# Altium PCB LM-008.PcbDoc
Units mm, origin at the board's own origin, x right, y up, seen from the top; angles counter-clockwise.
Board outline 67.05 x 70.02 mm, 2 copper layers (Top Layer, Bottom Layer); 43 components, 25 nets, 161 pads, 4 vias.
Unrouted connection lines stored in the file: 20.
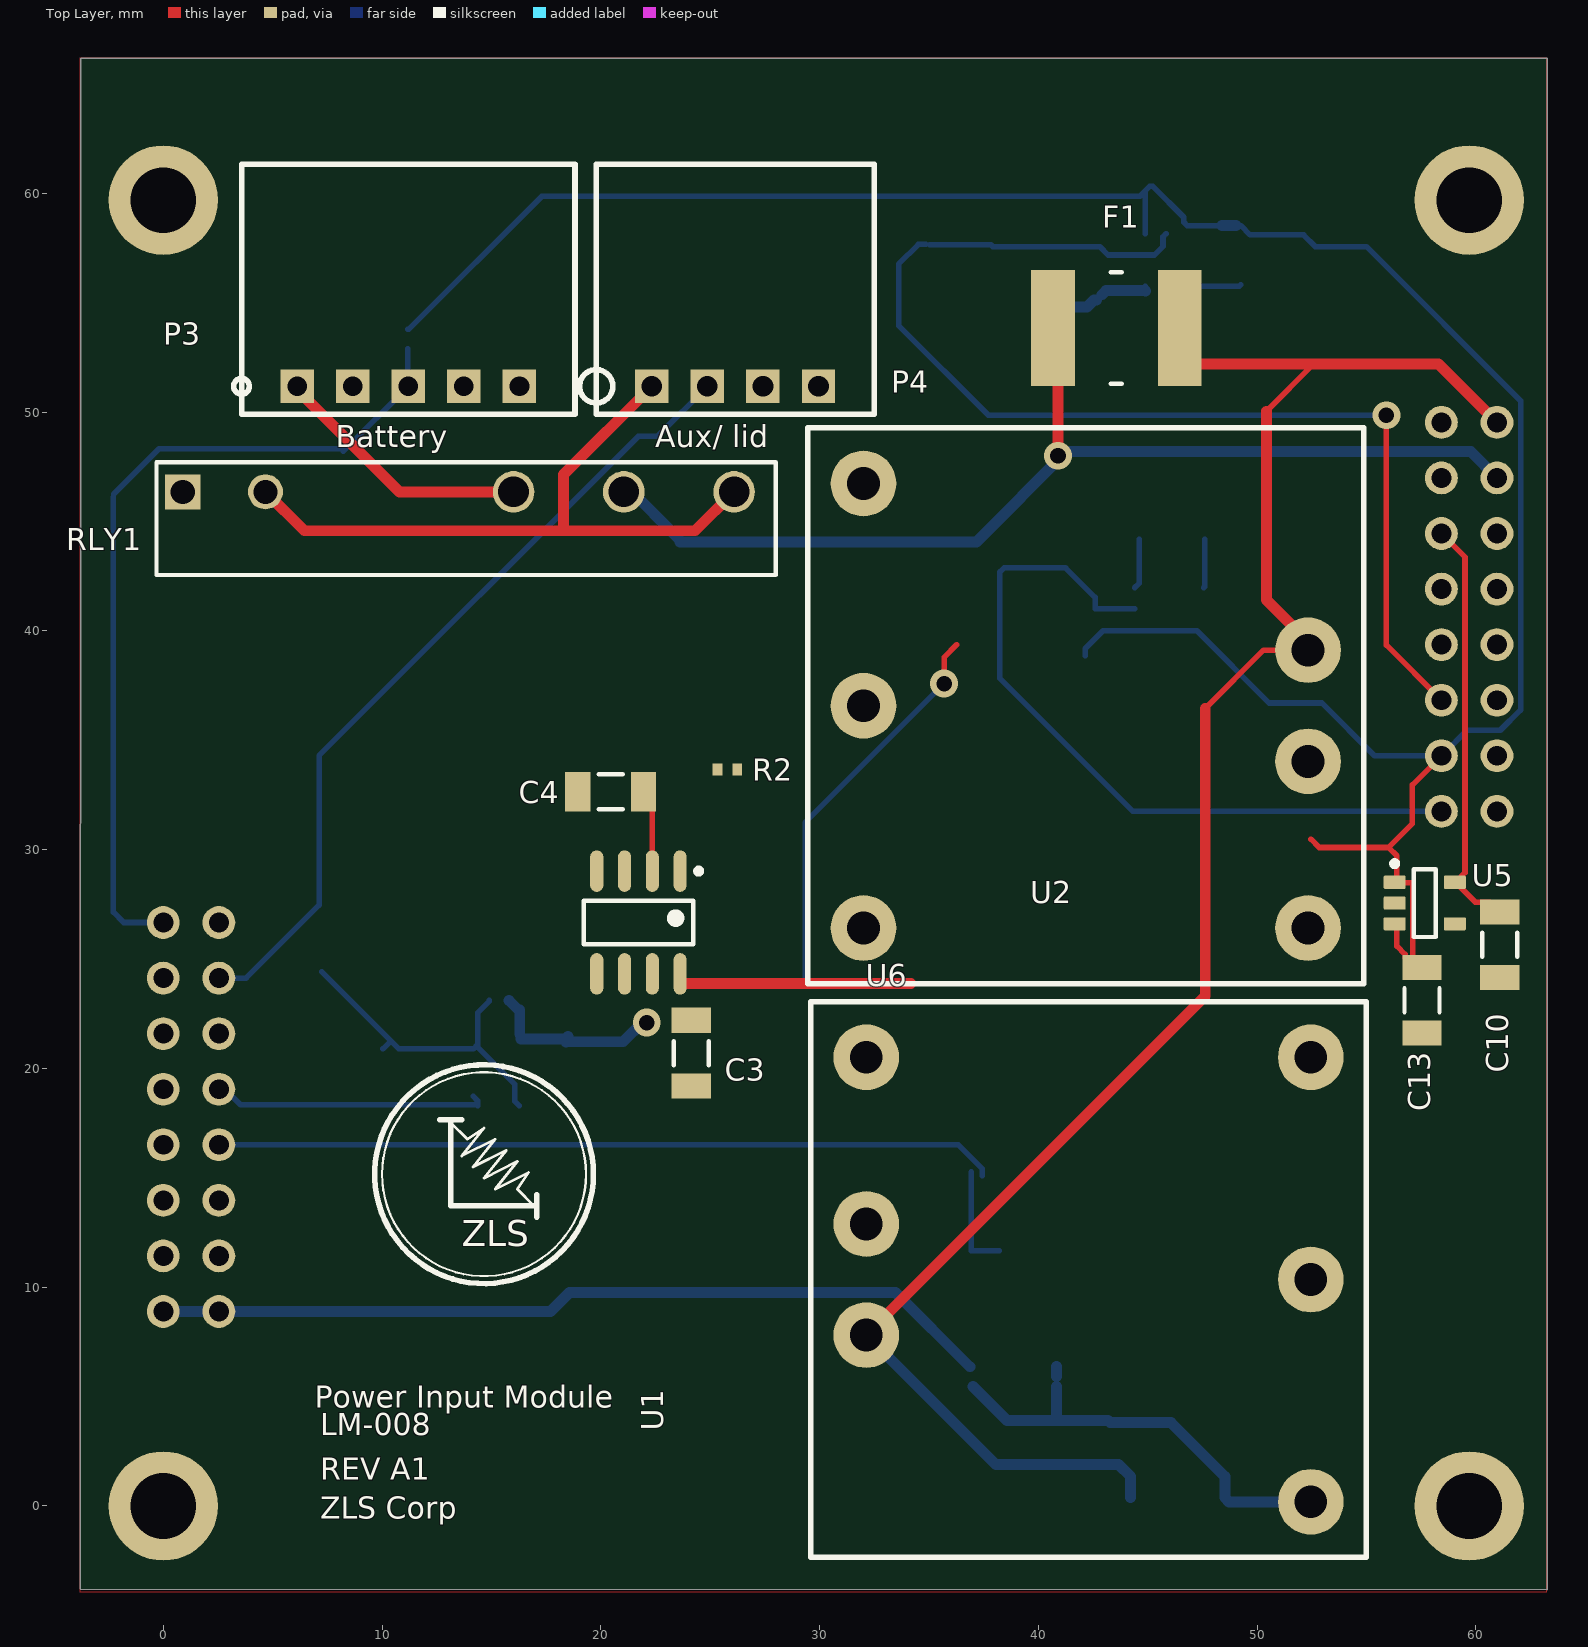
[diagram p0: Top Layer view]
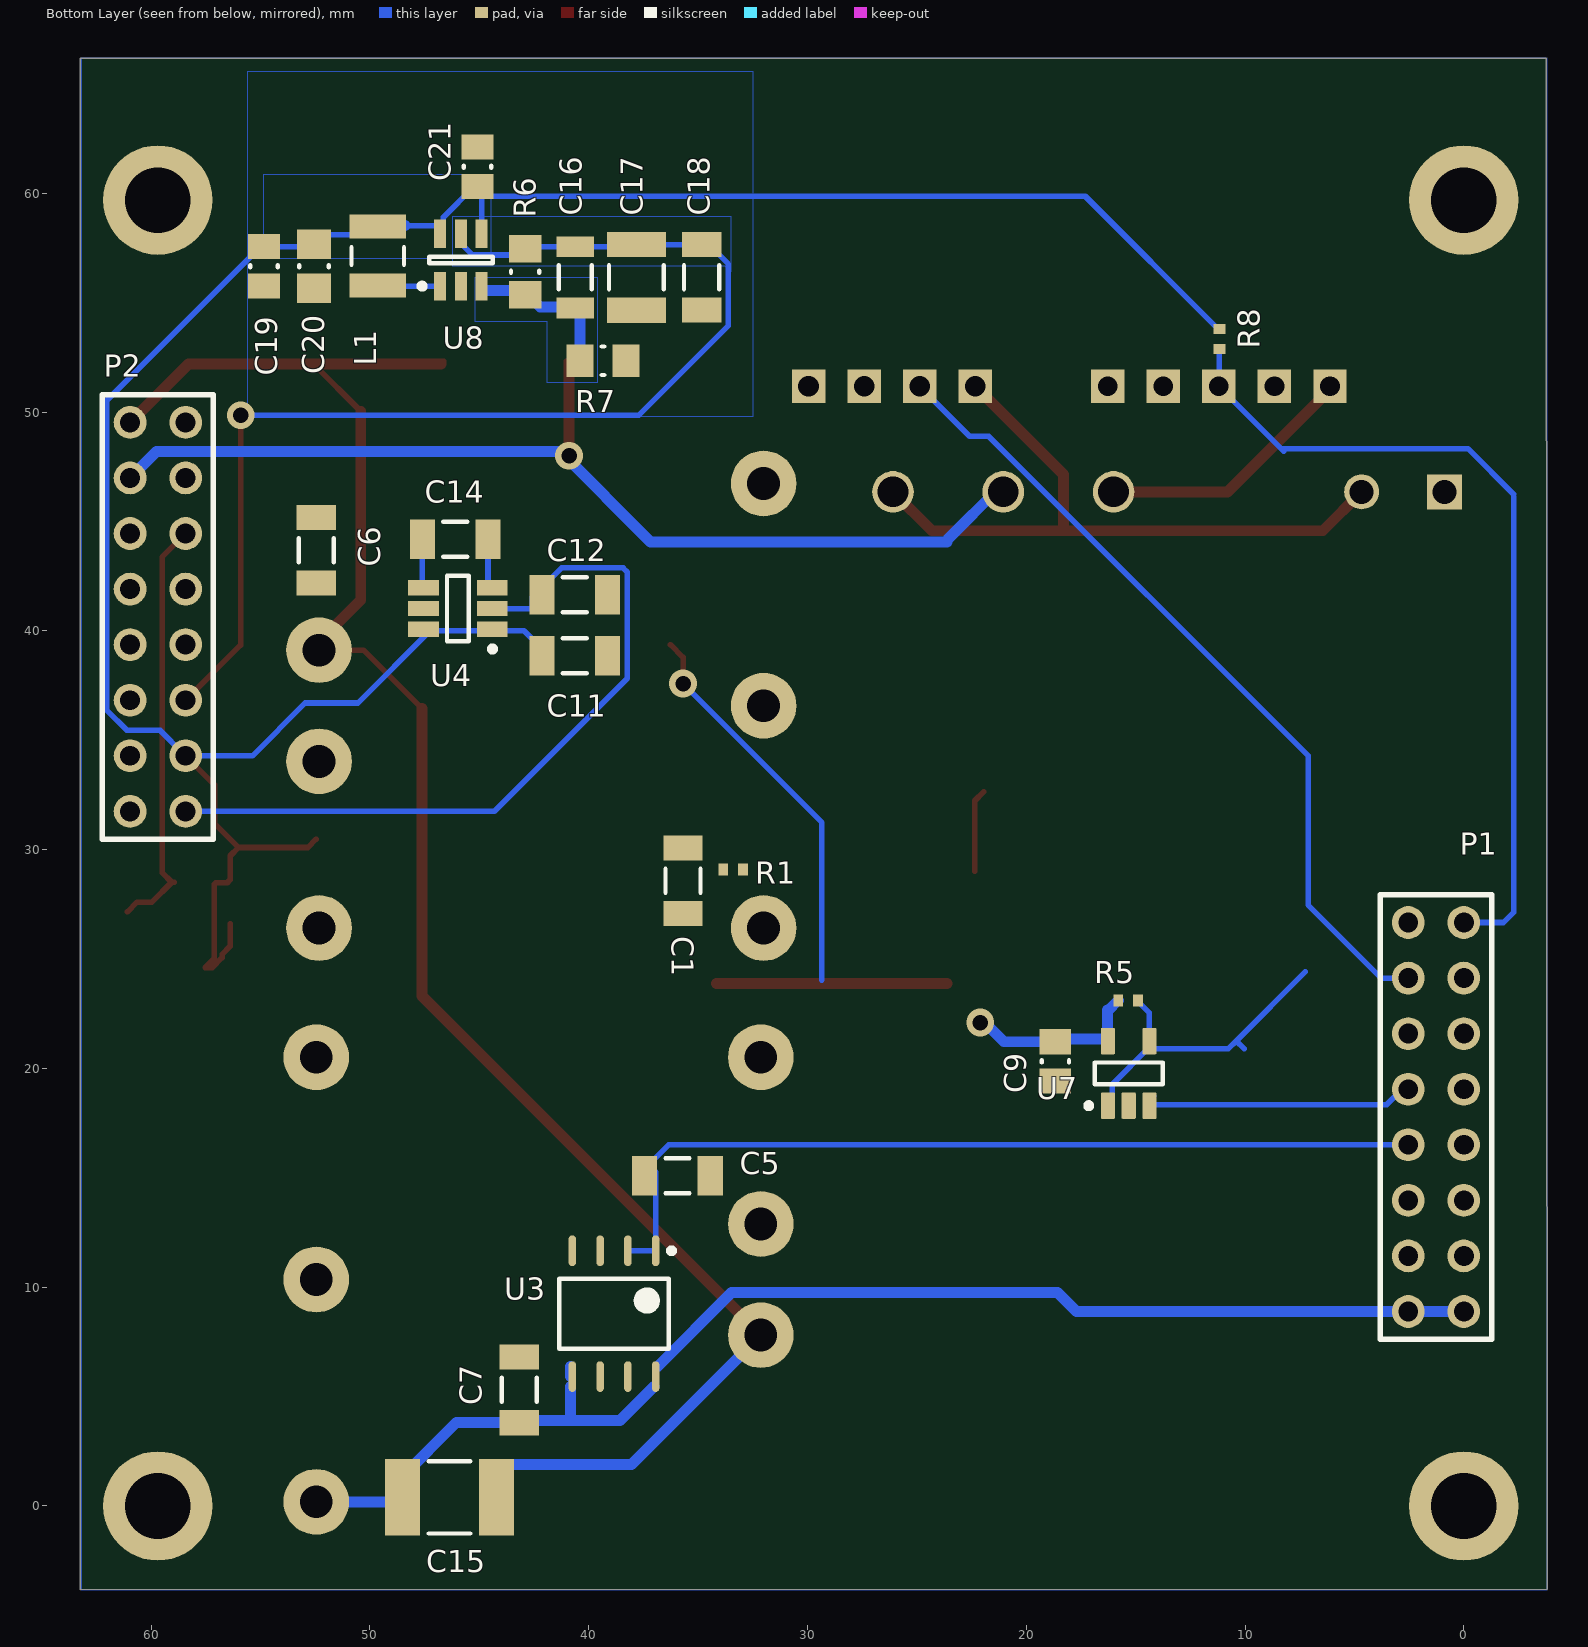
[diagram p1: Bottom Layer view, seen from below]

## Layer stack, top to bottom
Top Solder: solder mask 0.0102, Solder Resist, Dk 3.5
Top Layer: signal copper 0.0356
Dielectric 1: dielectric 0.32, FR-4, Dk 4.8
Bottom Layer: signal copper 0.0356
Bottom Solder: solder mask 0.0102, Solder Resist, Dk 3.5

## Board outline
-3.803,-3.81 63.246,-3.835 63.246,66.18 -3.778,66.178

## Design rules (kind name [scope] priority, off if disabled: settings)
Clearance [All] p1: gap=0.2 ignorepadtopadclearanceinfootprint=TRUE except(0.1: SMDPad-SMDPad)
HoleSize [All] p1: absolutevalues=TRUE maxlimit=5 minlimit=0.025 maxpercent=80.000 minpercent=20.000
MinimumSolderMaskSliver [All] p1: minsoldermaskwidth=0.037
PolygonConnect [All] p1: connectstyle=Relief reliefconductorwidth=0.254 reliefentries=4 polygonreliefangle="90 Angle" airgapwidth=0.254
RoutingVias [All] p1: holewidth=0.711 width=1.27 viastyle="Through Hole" minholewidth=0.711 minwidth=1.27 maxholewidth=0.711 maxwidth=1.27
SilkToSilkClearance [All] p1: silktosilkclearance=0.2
SilkToSolderMaskClearance [IsPad] p1: minsilkscreentomaskgap=0.175 clearancetoexposedcopper=TRUE
SolderMaskExpansion [All] p1: expansion=0.102
Width [All] p1: maxlimit=1 minlimit=0.127 preferedwidth=0.254
26 further rules are at their usual default settings.

## Classes and differential pairs
component class LM-008: C1 C2 C3 C4 C5 C6 C7 C8 C9 C10 C11 C12 C13 C14 C15 C22 P1 P2 R1 R2 R5 U1 U2 U3 U4 U5 U6 U7
component class 36V_Supply: C16 C17 C18 C19 C20 C21 L1 R6 R7 U8
component class Power_Input: F1 P3 P4 R8 RL2 RL? RLY1

## Components (designator, comment, footprint, x,y, rotation, side; value= is the part's Value field where it differs from the comment)
C1 "CAP CER 1UF 50V X7R 1210" CAPC1206(3216)130_N 35.687,28.575 r90 bottom
C2 "CAP CER 1UF 50V X7R 1210" CAPC1206(3216)130_N 68.326,40.513 r90 top
C3 "1uF" CAPC1206(3216)130_N 24.13,20.701 r90 top
C4 "CAP CER 1UF 50V X7R 1210" CAPC1206(3216)130_N 20.447,32.639 r180 top
C5 "CAP CER 1UF 50V X7R 1210" CAPC1206(3216)130_N 35.941,15.088 r0 bottom
C6 "CAP CER 1UF 50V X7R 1210" CAPC1206(3216)130_N 52.451,43.688 r90 bottom
C7 "CAP CER 1UF 50V X7R 1210" CAPC1206(3216)130_N 43.18,5.309 r270 bottom
C8 "CAP CER 1UF 50V X7R 1210" CAPC1206(3216)130_N 70.612,46.99 r0 top
C9 "CAP CER 0.1UF 16V X7R 0805" CAPC0805(2012)145_N 18.669,20.32 r270 bottom
C10 "CAP CER 1UF 50V X7R 1210" CAPC1206(3216)130_N 61.087,25.654 r90 top
C11 "CAP CER 1UF 50V X7R 1210" CAPC1206(3216)130_N 40.64,38.862 r0 bottom
C12 "CAP CER 1UF 50V X7R 1210" CAPC1206(3216)130_N 40.64,41.656 r0 bottom
C13 "CAP CER 1UF 50V X7R 1210" CAPC1206(3216)130_N 57.531,23.114 r90 top
C14 "CAP CER 1UF 50V X7R 1210" CAPC1206(3216)130_N 46.101,44.196 r180 bottom
C15 "CAP CER 470PF 3KV X7R 1812" CAPC1812(4532)230_M 46.368,0.391 r0 bottom
C16 "22pF" CAPC1206(3216)170_L 40.615,56.158 r90 bottom
C17 "CAP CER 1UF 50V X7R 1210" CAPC1210(3225)100_N 37.821,56.158 r90 bottom
C18 "CAP CER 0.47UF 50V X7R 1206" CAPC1206(3216)190_N 34.84,56.165 r90 bottom
C19 "CAP CER 1UF 16V X7R 0805" CAPC0805(2012)145_N 54.839,56.666 r90 bottom
C20 "4.7uF" CAPC0805(2012)145_M 52.553,56.666 r90 bottom
C21 "CAP CER 0.047UF 16V X7R 0603" CAPC0805(2012)145_N 45.085,61.214 r270 bottom
C22 "CAP CER 1UF 50V X7R 1210" CAPC1206(3216)130_N 66.961,-0.901 r0 top
F1 "PCT" CAPC7451X12N 43.561,53.848 r0 top
L1 "47uH" C1210 49.64,57.14 r270 bottom
P1 "TLW-108-05-G-D" TLW-108-05-G-D 1.27,17.78 r270 bottom
P2 "TLW-108-05-G-D" TLW-108-05-G-D 59.69,40.64 r270 bottom
P3 "IPL1-105-01-F-S-RA" IPL1-105-01-F-S-RA 11.197,51.178 r0 top
P4 "IPL1-104-01-L-S-RA-K" IPL1-104-01-L-S-RA-K 22.327,51.178 r0 top
R1 "DNP" RESC0402(1005)_L 33.401,29.083 r180 bottom
R2 "DNP" RESC0402(1005)_L 25.781,33.655 r0 top
R5 "1M" RESC0402(1005)_L 15.342,23.114 r0 bottom
R6 "RES SMD 280K OHM 1% 1/8W 0805" RESC0805(2012)_M 42.901,56.412 r270 bottom
R7 "RES SMD 10K OHM 1% 1/8W 0805" RESC0805(2012)_M 39.345,52.348 r180 bottom
R8 "6.98K" RESC0402(1005)_L 11.176,53.34 r90 bottom
RLY1 "APF30312" PNSC-PF-5-2800x500x1500_V 0.889,46.355 r0 top
U1 "LT1763CS8-5#PBF" LT-S8-8_L 21.717,26.67 r270 top
U2 "PXB15-24WS05/NT" PXB15-24WS05/NT 52.324,26.416 r180 top
U3 "BD90GA3WEFJ-E2" TSOP127P600X100-8N 38.843,8.791 r270 bottom
U4 "LTC1983ES6-5#TRMPBF" SOT95P323X100-6N 45.974,41.021 r0 bottom
U5 "TLV70233DBVR" DBV0005A_N 57.658,27.559 r0 top
U6 "CCG302412S" CCG30 32.131,12.891 r0 top
U7 "OPA188AIDBVR" DBV0005A_M 15.318,19.772 r90 bottom
U8 "LT3461" LT-S6-6-TSOT-23_N 45.841,56.956 r90 bottom

## Footprints (in the part's own frame and the unit in brackets; to place one, negate y for a bottom-side part, rotate by r counter-clockwise, add the part's x,y. Pads: shape width x height; smd on the part's side, far side on the other; paste and mask are expansions set on the pad)
C1210 [mm] "Chip Capacitor, Body 3.2x2.5mm, IPC High Density"
  rect 1.1x2.6 smd: 1(-1.35,0) 2(1.35,0)
  silkscreen extent -0.4,-1.2 0.4,1.2, body extent -1.7,-1.35 1.7,1.35, height 1.3
CAPC0805(2012)145_M [mm] "Chip Capacitor, Body 2.0x1.2mm, Height 1.45mm, IPC Low Density"
  rect 1.35x1.55 smd: 1(-1,0) 2(1,0)
  silkscreen extent -0.05,-0.67 0.05,0.68, body extent -1.1,-0.72 1.1,0.72, height 1.45
CAPC0805(2012)145_N [mm] "Chip Capacitor, Body 2.0x1.2mm, Height 1.45mm, IPC Medium Density"
  rect 1.15x1.45 smd: 1(-0.9,0) 2(0.9,0)
  silkscreen extent -0.05,-0.62 0.05,0.62, body extent -1.1,-0.72 1.1,0.73, height 1.45
CAPC1206(3216)130_N [mm] "Chip Capacitor, Body 3.2x1.6mm, Height 1.3mm, IPC Medium Density"
  rect 1.15x1.8 smd: 1(-1.5,0) 2(1.5,0)
  silkscreen extent -0.55,-0.8 0.55,0.8, body extent -1.7,-0.9 1.7,0.9, height 1.3
CAPC1206(3216)170_L [mm] "Chip Capacitor, Body 3.2x1.6mm, Height 1.7mm, IPC High Density"
  rect 0.95x1.7 smd: 1(-1.4,0) 2(1.4,0)
  silkscreen extent -0.55,-0.75 0.55,0.75, body extent -1.7,-0.9 1.7,0.9, height 1.7
CAPC1206(3216)190_N [mm] "Chip Capacitor, Body 3.2x1.6mm, Height 1.9mm, IPC Medium Density"
  rect 1.15x1.8 smd: 1(-1.5,0) 2(1.5,0)
  silkscreen extent -0.55,-0.8 0.55,0.8, body extent -1.7,-0.9 1.7,0.9, height 1.9
CAPC1210(3225)100_N [mm] "Chip Capacitor, Body 3.2x2.5mm, Height 1mm, IPC Medium Density"
  rect 1.15x2.7 smd: 1(-1.5,0) 2(1.5,0)
  silkscreen extent -0.55,-1.25 0.55,1.25, body extent -1.7,-1.35 1.7,1.35, height 1
CAPC1812(4532)230_M [mm] "Chip Capacitor, Body 4.5x3.2mm, Height 2.3mm, IPC Low Density"
  rect 1.6x3.5 smd: 1(-2.15,0) 2(2.15,0)
  silkscreen extent -0.95,-1.65 0.95,1.65, body extent -2.4,-1.7 2.4,1.7, height 2.3
CAPC7451X12N [mm] "Chip Capacitor, 2-Leads, Body 7.36x5.12mm, IPC Medium Density"
  rect 2x5.3 smd: 1(-2.9,0) 2(2.9,0)
  silkscreen extent -0.25,-2.55 0.25,2.55, body extent -3.99,-2.72 3.99,2.72, height 1.25
CCG30 [mm] "DC-DC Converter"
  round 3 hole 1.5: 1(0,7.62) 2(0,0) 3(0,-5.08) 4(20.32,-12.7) 5(20.32,-2.54) 6(20.32,7.62)
  silkscreen extent -2.54,-15.24 22.86,10.16, body extent -2.67,-15.37 22.99,10.29, height 9.9
DBV0005A_M [mm] "SOT23, 5-Leads, Body 3.05x1.75mm, Pitch 0.95mm, IPC Low Density"
  rrect15% 1.2x0.65 smd: 1(-1.475,0.95) 2(-1.475,0) 3(-1.475,-0.95) 4(1.475,-0.95) 5(1.475,0.95)
  silkscreen extent -1.6,-1.55 0.5,1.95, body extent -1.42,-1.46 1.42,1.46, height 1.08
DBV0005A_N [mm] "SOT23, 5-Leads, Body 3.05x1.75mm, Pitch 0.95mm, IPC Medium Density"
  rrect17% 1x0.6 smd: 1(-1.375,0.95) 2(-1.375,0) 3(-1.375,-0.95) 4(1.375,-0.95) 5(1.375,0.95)
  silkscreen extent -1.5,-1.55 0.5,1.92, body extent -1.42,-1.46 1.42,1.46, height 1.08
IPL1-104-01-L-S-RA-K [mil]
  rect 60x60 hole 37.4: 1(0,0) 2(100,0) 3(200,0) 4(300,0)
  silkscreen extent -130,-50 400,400, body extent -80,-12 380,380, height 258
IPL1-105-01-F-S-RA [mil]
  rect 60x60 hole 35.43: 1(-200,0) 2(-100,0) 3(0,0) 4(100,0) 5(200,0)
  silkscreen extent -314,-50 300,400, body extent -270,-7 290,390, height 258
LT-S6-6-TSOT-23_N [mm] "SOT23, 6-Leads, Body 2.9x1.75mm, Pitch 0.95mm, IPC Medium Density"
  rect 1.3x0.55 smd: 1(-1.2,0.95) 2(-1.2,0) 3(-1.2,-0.95) 4(1.2,-0.95) 5(1.2,0) 6(1.2,0.95)
  silkscreen extent -1.32,-1.45 0.15,1.9, body extent -0.87,-1.45 0.87,1.45, height 1
LT-S8-8_L [mm] "SOIC, 8-Leads, Body 4.9x3.9mm, Pitch 1.27mm, IPC High Density"
  oval 1.9x0.6 smd: 1(-2.35,1.905) 2(-2.35,0.635) 3(-2.35,-0.635) 4(-2.35,-1.905) 5(2.35,-1.905) 6(2.35,-0.635) 7(2.35,0.635) 8(2.35,1.905)
  silkscreen extent -2.47,-2.5 1,2.88, body extent -2,-2.5 2,2.5, height 1.76
PNSC-PF-5-2800x500x1500_V [mm] "PF, 5-Leads, Body 28x5mm"
  rect 1.6x1.6 hole 1.1: 1(0,0)
  round 1.6 hole 1.1: 2(3.78,0)
  round 1.9 hole 1.4: 3(15.12,0) 4(20.16,0) 5(25.2,0)
  silkscreen extent -1.2,-3.8 27.1,1.35, body extent -0.9,-3.8 27.1,1.2, height 15
PXB15-24WS05/NT [mm] "DC-DC Converter 5V 3A 15W"
  round 3 hole 1.5: 1(0,0) 2(0,-7.62) 3(0,-12.7) 4(20.32,-20.32) 5(20.32,-10.16) 6(20.32,0)
  silkscreen extent -2.54,-22.86 22.86,2.54, body extent -2.67,-22.99 22.99,2.67, height 9.9
RESC0402(1005)_L [mm] "Chip Resistor, Body 1.0x0.5mm, IPC High Density"
  rect 0.45x0.55 smd: 1(-0.45,0) 2(0.45,0)
  body extent -0.52,-0.27 0.53,0.28, height 0.4
RESC0805(2012)_M [mm] "Chip Resistor, Body 2.0x1.3mm, IPC Low Density"
  rect 1.25x1.5 smd: 1(-1.05,0) 2(1.05,0)
  silkscreen extent -0.05,-0.65 0.05,0.65, body extent -1.1,-0.67 1.1,0.67, height 0.7
SOT95P323X100-6N [mm] "SOT23, 6-Leads, Body 2.90x3.23mm, Pitch 0.95mm, IPC Medium Density"
  rect 1.4x0.7 smd: 1(-1.575,0.95) 2(-1.575,0) 3(-1.575,-0.95) 4(1.575,-0.95) 5(1.575,0) 6(1.575,0.95)
  silkscreen extent -1.7,-1.5 0.5,1.97, body extent -1.92,-1.5 1.93,1.5, height 1
TLW-108-05-G-D [mm]
  round 1.5 hole 0.91: 1(-8.89,-1.27) 2(-8.89,1.27) 3(-6.35,-1.27) 4(-6.35,1.27) 5(-3.81,-1.27) 6(-3.81,1.27) 7(-1.27,-1.27) 8(-1.27,1.27) 9(1.27,-1.27) 10(1.27,1.27) 11(3.81,-1.27) 12(3.81,1.27) 13(6.35,-1.27) 14(6.35,1.27) 15(8.89,-1.27) 16(8.89,1.27)
  silkscreen extent -10.16,-2.54 10.16,2.54, body extent -10.16,-2.51 10.16,2.51, height 6.35
TSOP127P600X100-8N [mm] "TSOP, 8-Leads, Body 4.90x3.90mm, Pitch 1.27mm, IPC Medium Density"
  oval 1.4x0.35 smd: 1(-2.875,1.905) 2(-2.875,0.635) 3(-2.875,-0.635) 4(-2.875,-1.905) 5(2.875,-1.905) 6(2.875,-0.635) 7(2.875,0.635) 8(2.875,1.905)
  silkscreen extent -3,-2.5 1.6,2.75, body extent -2,-2.5 2,2.5, height 1

## Part data
C1 C22: library part CMP-1037-04913-1, Capacitance=470pF, Manufacturer="Murata Electronics North America", Manufacturer Part Number=GRM32RR71H105KA01L, Operating Temperature="-55°C ~ 125°C", Package / Case="1210 (3225 Metric)", Ratings=-, Supplier Part Number 1=490-1863-6-ND, Temperature Coefficient=X7R, Tolerance=±10%, Voltage - Rated=50V, Applications="General Purpose", Category=Capacitors, ComponentLink1Description=http://search.murata.co.jp/Ceramy/image/img/A01X/G101/ENG/GRM32RR71H105KA01-01.pdf, ComponentLink1URL=http://search.murata.co.jp/Ceramy/image/img/A01X/G101/ENG/GRM32RR71H105KA01-01.pdf, Features=-, Height - Seated (Max)=-, Lead Spacing=-, Lead Style=-, Mounting Type="Surface Mount, MLCC", Packaging=Digi-Reel®, Part Status=Active, Pricing 1="1=0.35, 10=0.242, 100=0.1449, 500=0.10868 (USD)", RoHS="RoHS Compliant", Size / Dimension="0.126\" L x 0.098\" W (3.20mm x 2.50mm)", Stock 1=66890, Supplier 1=Digi-Key, Thickness (Max)="0.079\" (2.00mm)"
C2 C11 C12: library part CMP-1037-04913-1, Capacitance=10µF, Manufacturer="Murata Electronics North America", Manufacturer Part Number=GRM32RR71H105KA01L, Operating Temperature="-55°C ~ 125°C", Package / Case="1210 (3225 Metric)", Ratings=-, Supplier Part Number 1=490-1863-6-ND, Temperature Coefficient=X7R, Tolerance=±10%, Voltage - Rated=50V, Applications="General Purpose", Category=Capacitors, ComponentLink1Description=http://search.murata.co.jp/Ceramy/image/img/A01X/G101/ENG/GRM32RR71H105KA01-01.pdf, ComponentLink1URL=http://search.murata.co.jp/Ceramy/image/img/A01X/G101/ENG/GRM32RR71H105KA01-01.pdf, Features=-, Height - Seated (Max)=-, Lead Spacing=-, Lead Style=-, Mounting Type="Surface Mount, MLCC", Packaging=Digi-Reel®, Part Status=Active, Pricing 1="1=0.35, 10=0.242, 100=0.1449, 500=0.10868 (USD)", RoHS="RoHS Compliant", Size / Dimension="0.126\" L x 0.098\" W (3.20mm x 2.50mm)", Stock 1=66890, Supplier 1=Digi-Key, Thickness (Max)="0.079\" (2.00mm)"
C3: library part CMP-1037-04913-1
C4: library part CMP-1037-04913-1, Capacitance=10000pF, Manufacturer="Murata Electronics North America", Manufacturer Part Number=GRM32RR71H105KA01L, Operating Temperature="-55°C ~ 125°C", Package / Case="1210 (3225 Metric)", Ratings=-, Supplier Part Number 1=490-1863-6-ND, Temperature Coefficient=X7R, Tolerance=±10%, Voltage - Rated=50V, Applications="General Purpose", Category=Capacitors, ComponentLink1Description=http://search.murata.co.jp/Ceramy/image/img/A01X/G101/ENG/GRM32RR71H105KA01-01.pdf, ComponentLink1URL=http://search.murata.co.jp/Ceramy/image/img/A01X/G101/ENG/GRM32RR71H105KA01-01.pdf, Features=-, Height - Seated (Max)=-, Lead Spacing=-, Lead Style=-, Mounting Type="Surface Mount, MLCC", Packaging=Digi-Reel®, Part Status=Active, Pricing 1="1=0.35, 10=0.242, 100=0.1449, 500=0.10868 (USD)", RoHS="RoHS Compliant", Size / Dimension="0.126\" L x 0.098\" W (3.20mm x 2.50mm)", Stock 1=66890, Supplier 1=Digi-Key, Thickness (Max)="0.079\" (2.00mm)"
C5 C7 C10 C13 C14: library part CMP-1037-04913-1, Capacitance=1µF, Manufacturer="Murata Electronics North America", Manufacturer Part Number=GRM32RR71H105KA01L, Operating Temperature="-55°C ~ 125°C", Package / Case="1210 (3225 Metric)", Ratings=-, Supplier Part Number 1=490-1863-6-ND, Temperature Coefficient=X7R, Tolerance=±10%, Voltage - Rated=50V, Applications="General Purpose", Category=Capacitors, ComponentLink1Description=http://search.murata.co.jp/Ceramy/image/img/A01X/G101/ENG/GRM32RR71H105KA01-01.pdf, ComponentLink1URL=http://search.murata.co.jp/Ceramy/image/img/A01X/G101/ENG/GRM32RR71H105KA01-01.pdf, Features=-, Height - Seated (Max)=-, Lead Spacing=-, Lead Style=-, Mounting Type="Surface Mount, MLCC", Packaging=Digi-Reel®, Part Status=Active, Pricing 1="1=0.35, 10=0.242, 100=0.1449, 500=0.10868 (USD)", RoHS="RoHS Compliant", Size / Dimension="0.126\" L x 0.098\" W (3.20mm x 2.50mm)", Stock 1=66890, Supplier 1=Digi-Key, Thickness (Max)="0.079\" (2.00mm)"
C6 C8: library part CMP-1037-04913-1, Capacitance=6.8µF, Manufacturer="Murata Electronics North America", Manufacturer Part Number=GRM32RR71H105KA01L, Operating Temperature="-55°C ~ 125°C", Package / Case="1210 (3225 Metric)", Ratings=-, Supplier Part Number 1=490-1863-6-ND, Temperature Coefficient=X7R, Tolerance=±10%, Voltage - Rated=50V, Applications="General Purpose", Category=Capacitors, ComponentLink1Description=http://search.murata.co.jp/Ceramy/image/img/A01X/G101/ENG/GRM32RR71H105KA01-01.pdf, ComponentLink1URL=http://search.murata.co.jp/Ceramy/image/img/A01X/G101/ENG/GRM32RR71H105KA01-01.pdf, Features=-, Height - Seated (Max)=-, Lead Spacing=-, Lead Style=-, Mounting Type="Surface Mount, MLCC", Packaging=Digi-Reel®, Part Status=Active, Pricing 1="1=0.35, 10=0.242, 100=0.1449, 500=0.10868 (USD)", RoHS="RoHS Compliant", Size / Dimension="0.126\" L x 0.098\" W (3.20mm x 2.50mm)", Stock 1=66890, Supplier 1=Digi-Key, Thickness (Max)="0.079\" (2.00mm)"
C9: library part CMP-1036-04795-1, Capacitance=0.1µF, Manufacturer="Murata Electronics North America", Manufacturer Part Number=GRM219R71C104KA01D, Operating Temperature="-55°C ~ 125°C", Package / Case="0805 (2012 Metric)", Ratings=-, Supplier Part Number 1=490-1673-6-ND, Temperature Coefficient=X7R, Tolerance=±10%, Voltage - Rated=25V, Applications="General Purpose", Category=Capacitors, ComponentLink1Description=http://www.murata.com/~/media/webrenewal/support/library/catalog/products/capacitor/mlcc/c02e.ashx, ComponentLink1URL=http://www.murata.com/~/media/webrenewal/support/library/catalog/products/capacitor/mlcc/c02e.ashx, Features=-, Height - Seated (Max)=-, Lead Spacing=-, Lead Style=-, Mounting Type="Surface Mount, MLCC", Packaging=Digi-Reel®, Part Status=Active, Pricing 2="1=0.14, 10=0.098, 100=0.0462, 500=0.0324, 1000=0.02683 (USD)", RoHS="RoHS Compliant", Size / Dimension="0.079\" L x 0.049\" W (2.00mm x 1.25mm)", Stock 2=245331, Supplier 2=Digi-Key, Supplier Part Number 2=490-1683-6-ND, Thickness (Max)="0.053\" (1.35mm)"
C15: library part CMP-1040-00561-1, Capacitance=470pF, Case/Package=1812, Case Code (Metric)=4532, Manufacturer=Kemet, Manufacturer Part Number=C1812C471KHRACTU, Max Operating Temperature=125°C, Min Operating Temperature=-55°C, Package Quantity=1, Supplier Part Number 1=399-7289-6-ND, Tolerance=10%, Voltage Rating=3kV, Case Code (Imperial)=1812, ComponentLink1Description=http://www.kemet.com/docfinder?Partnumber=C1812C471KHRACTU, ComponentLink1URL=http://www.kemet.com/docfinder?Partnumber=C1812C471KHRACTU, Lead Free="Lead Free", Length=0.177inch, Packaging="Tape and Reel", Pricing 1="1=0.88, 10=0.666, 100=0.4761 (USD)", Stock 1=2705, Supplier 1=Digi-Key, Thickness=0.071inch, Voltage Rating (DC)=3kV, Width=0.126inch
C16: library part CMP-1037-04573-1, "CAP CER 22PF 50V C0G/NP0 1206", Manufacturer=KEMET, Manufacturer Part Number=C1206C220K5GACTU, Operating Temperature="-55°C ~ 125°C", Package / Case="1206 (3216 Metric)", Ratings=-, Supplier Part Number 1=399-8165-1-ND, Temperature Coefficient="C0G, NP0", Tolerance=±10%, Voltage - Rated=50V, Applications="General Purpose", Category=Capacitors, ComponentLink1Description=http://www.kemet.com/docfinder?Partnumber=C1206C220K2GACTU, ComponentLink1URL=http://www.kemet.com/docfinder?Partnumber=C1206C220K2GACTU, Failure Rate=-, Features="Low ESL", Height - Seated (Max)=-, Lead Spacing=-, Lead Style=-, Mounting Type="Surface Mount, MLCC", Packaging="Cut Tape (CT)", Part Status=Active, Pricing 1="1=0.18, 10=0.128, 100=0.06, 500=0.04208, 1000=0.03483 (USD)", RoHS="RoHS Compliant", Size / Dimension="0.126\" L x 0.063\" W (3.20mm x 1.60mm)", Stock 1=35613, Supplier 1=Digi-Key, Thickness (Max)="0.035\" (0.88mm)"
C17: library part CMP-1038-01123-1, Capacitance=1µF, Manufacturer="Taiyo Yuden", Manufacturer Part Number=UMK325B7105KH-T, Operating Temperature="-55°C ~ 125°C", Package / Case="1210 (3225 Metric)", Ratings=-, Supplier Part Number 1=587-1366-1-ND, Temperature Coefficient=X7R, Tolerance=±10%, Voltage - Rated=50V, Applications="General Purpose", Category=Capacitors, ComponentLink1Description=http://www.yuden.co.jp/productdata/catalog/en/mlcc_all_e.pdf, ComponentLink1URL=http://www.yuden.co.jp/productdata/catalog/en/mlcc_all_e.pdf, Features=-, Height - Seated (Max)=-, Lead Spacing=-, Lead Style=-, Mounting Type="Surface Mount, MLCC", Packaging="Cut Tape (CT)", Part Status=Active, Pricing 1="1=0.36, 10=0.247, 100=0.1398, 500=0.0987, 1000=0.08637 (USD)", RoHS="RoHS Compliant", Size / Dimension="0.126\" L x 0.098\" W (3.20mm x 2.50mm)", Stock 1=23864, Supplier 1=Digi-Key, Thickness (Max)="0.063\" (1.60mm)"
C18: library part CMP-1037-04570-1, Capacitance=0.47µF, Manufacturer="Taiyo Yuden", Manufacturer Part Number=UMK316B7474KL-T, Operating Temperature="-55°C ~ 125°C", Package / Case="1206 (3216 Metric)", Ratings=-, Supplier Part Number 1=587-1325-1-ND, Temperature Coefficient=X7R, Tolerance=±10%, Voltage - Rated=50V, Applications="General Purpose", Category=Capacitors, ComponentLink1Description=http://www.yuden.co.jp/productdata/catalog/en/mlcc_all_e.pdf, ComponentLink1URL=http://www.yuden.co.jp/productdata/catalog/en/mlcc_all_e.pdf, Features=-, Height - Seated (Max)=-, Lead Spacing=-, Lead Style=-, Mounting Type="Surface Mount, MLCC", Packaging="Cut Tape (CT)", Part Status=Active, Pricing 1="1=0.3, 10=0.203, 100=0.115, 500=0.08114, 1000=0.071 (USD)", RoHS="RoHS Compliant", Size / Dimension="0.126\" L x 0.063\" W (3.20mm x 1.60mm)", Stock 1=8658, Supplier 1=Digi-Key, Thickness (Max)="0.071\" (1.80mm)"
C19: library part CMP-1036-04795-1, Capacitance=1µF, Manufacturer="Taiyo Yuden", Manufacturer Part Number=EMK212B7105KG-T, Operating Temperature="-55°C ~ 125°C", Package / Case="0805 (2012 Metric)", Ratings=-, Supplier Part Number 1=587-1283-1-ND, Temperature Coefficient=X7R, Tolerance=±10%, Voltage - Rated=16V, Applications="General Purpose", Category=Capacitors, ComponentLink1Description=http://ds.yuden.co.jp/TYCOMPAS/ut/detail.do?productNo=EMK212B7105KG-T&fileName=EMK212B7105KG-T_SS&mode=specSheetDownload, ComponentLink1URL=http://ds.yuden.co.jp/TYCOMPAS/ut/detail.do?productNo=EMK212B7105KG-T&fileName=EMK212B7105KG-T_SS&mode=specSheetDownload, Features=-, Height - Seated (Max)=-, Lead Spacing=-, Lead Style=-, Mounting Type="Surface Mount, MLCC", Packaging="Cut Tape (CT)", Part Status=Active, Pricing 1="1=0.13, 10=0.089, 100=0.042, 1000=0.02439 (USD)", RoHS="RoHS Compliant", Size / Dimension="0.079\" L x 0.049\" W (2.00mm x 1.25mm)", Stock 1=41495, Supplier 1=Digi-Key, Thickness (Max)="0.053\" (1.35mm)"
C20: library part CMP-1036-04750-1, "CAP CER 4.7UF 16V X7R 0805", Manufacturer=KEMET, Manufacturer Part Number=C0805C475K4RACTU, Operating Temperature="-55°C ~ 125°C", Package / Case="0805 (2012 Metric)", Ratings=-, Supplier Part Number 1=399-7415-1-ND, Temperature Coefficient=X7R, Tolerance=±10%, Voltage - Rated=16V, Applications="General Purpose", Category=Capacitors, ComponentLink1Description=http://www.kemet.com/docfinder?Partnumber=C0805C475K4RACTU, ComponentLink1URL=http://www.kemet.com/docfinder?Partnumber=C0805C475K4RACTU, Failure Rate=-, Features="Low ESL", Height - Seated (Max)=-, Lead Spacing=-, Lead Style=-, Mounting Type="Surface Mount, MLCC", Packaging="Cut Tape (CT)", Part Status=Active, Pricing 1="1=0.26, 10=0.176, 100=0.0894, 500=0.06118, 1000=0.05412 (USD)", RoHS="RoHS Compliant", Size / Dimension="0.079\" L x 0.049\" W (2.00mm x 1.25mm)", Stock 1=88820, Supplier 1=Digi-Key, Thickness (Max)="0.055\" (1.40mm)"
C21: library part CMP-1036-04795-1, Capacitance=0.047µF, Manufacturer="Murata Electronics North America", Manufacturer Part Number=GRM188R71C473KA01D, Operating Temperature="-55°C ~ 125°C", Package / Case="0603 (1608 Metric)", Ratings=-, Supplier Part Number 1=490-1529-6-ND, Temperature Coefficient=X7R, Tolerance=±10%, Voltage - Rated=16V, Applications="General Purpose", Category=Capacitors, ComponentLink1Description=http://www.murata.com/~/media/webrenewal/support/library/catalog/products/capacitor/mlcc/c02e.ashx, ComponentLink1URL=http://www.murata.com/~/media/webrenewal/support/library/catalog/products/capacitor/mlcc/c02e.ashx, Features=-, Height - Seated (Max)=-, Lead Spacing=-, Lead Style=-, Mounting Type="Surface Mount, MLCC", Packaging=Digi-Reel®, Part Status=Active, Pricing 1="1=0.1, 10=0.046, 100=0.0206, 500=0.0147, 1000=0.01155 (USD)", RoHS="RoHS Compliant", Size / Dimension="0.063\" L x 0.031\" W (1.60mm x 0.80mm)", Stock 1=26, Supplier 1=Digi-Key, Thickness (Max)="0.035\" (0.90mm)"
L1: library part Inductor, "FIXED IND 47UH 170MA 1.3 OHM SMD", DC Resistance (DCR)="1.69 Ohm Max", Manufacturer="Murata Electronics North America", Manufacturer Part Number=LQH32CN470K23L, Operating Temperature="-40°C ~ 85°C", Package / Case=Nonstandard, Q @ Freq=-, Supplier Device Package=1210, Supplier Part Number 1=490-2497-1-ND, Tolerance=±10%, Category="Inductors, Coils, Chokes", ComponentLink1Description=http://search.murata.co.jp/Ceramy/image/img/P02/JELF243A-0039.pdf, ComponentLink1URL=http://search.murata.co.jp/Ceramy/image/img/P02/JELF243A-0039.pdf, Height - Seated (Max)="0.067\" (1.70mm)", Material - Core=Ferrite, Mounting Type="Surface Mount", Packaging="Cut Tape (CT)", Part Status=Active, Pricing 1="1=0.33, 10=0.297, 100=0.2043, 500=0.17458, 1000=0.13372 (USD)", Ratings=-, RoHS="RoHS Compliant", Shielding=Unshielded, Size / Dimension="0.126\" L x 0.098\" W (3.20mm x 2.50mm)", Stock 1=1058, Supplier 1=Digi-Key, Type=Wirewound
P1 P2: "CONN HEADER .100\" 16POS DL GOLD", Current Rating="5.2A per Contact", Insulation Color=Black, Manufacturer="Samtec Inc.", Material Flammability Rating=-, Operating Temperature="-55°C ~ 125°C", Supplier Part Number 1=SAM1094-08-ND, Applications=-, Category="Connectors, Interconnects", ComponentLink1Description=http://suddendocs.samtec.com/prints/tlw-mkt.pdf, ComponentLink1URL=http://suddendocs.samtec.com/prints/tlw-mkt.pdf, Connector Type=Header, Contact Finish - Mating=Gold, Contact Finish - Post=Gold, Contact Finish Thickness - Mating="10µin (0.25µm)", Contact Finish Thickness - Post=Flash, Contact Length - Mating="0.105\" (2.67mm)", Contact Length - Post="0.170\" (4.32mm)", Contact Material="Phosphor Bronze", Contact Shape=Square, Contact Type="Male Pin", Fastening Type=Push-Pull, Features=-, Ingress Protection=-, Insulation Height="0.060\" (1.52mm)", Insulation Material="Liquid Crystal Polymer (LCP)", Manufacturer Part Number=TLW-108-05-G-D, Mated Stacking Heights=-, Mounting Type="Through Hole", Number of Positions=16, Number of Positions Loaded=All, Number of Rows=2, Overall Contact Length="0.335\" (8.51mm)", Packaging=Bulk, Part Status=Active, Pitch - Mating="0.100\" (2.54mm)", Pricing 1="1=4.48, 10=4.006, 100=3.2987, 500=2.60756, 1000=2.23842, 5000=2.04207, 10000=1.96353 (USD)", RoHS="RoHS Compliant", Row Spacing - Mating="0.100\" (2.54mm)", Shrouding=Unshrouded, Stock 1=0, Style="Board to Board or Cable", Supplier 1=Digi-Key, Termination=Solder, Voltage Rating=-
P3: Supplier Part Number 1=IPL1-105-01-F-S-RA-K-ND, Supplier 1=Digi-Key
P4: Current Rating=-, Insulation Color=Natural, Manufacturer="Samtec Inc.", Material Flammability Rating="UL94 V-0", Operating Temperature="-55°C ~ 125°C", Supplier Part Number 1=SAM9597-ND, Voltage Rating="675VAC, 954VDC", Applications=-, Category="Connectors, Interconnects", ComponentLink1Description=http://suddendocs.samtec.com/prints/ipl1-1xx-xx-xxx-s-xx-x-xx-mkt.pdf, ComponentLink1URL=http://suddendocs.samtec.com/prints/ipl1-1xx-xx-xxx-s-xx-x-xx-mkt.pdf, Connector Type=Header, Contact Finish - Mating=Gold, Contact Finish - Post=Tin, Contact Finish Thickness - Mating="10µin (0.25µm)", Contact Finish Thickness - Post=-, Contact Length - Mating="0.215\" (5.46mm)", Contact Length - Post="0.085\" (2.16mm)", Contact Material="Phosphor Bronze", Contact Shape=Square, Contact Type="Male Pin", Fastening Type="Locking Ramp", Features=-, Ingress Protection=-, Insulation Height="0.240\" (6.10mm)", Insulation Material="Liquid Crystal Polymer (LCP)", Manufacturer Part Number=IPL1-104-01-L-S-RA-K, Mated Stacking Heights=-, Mounting Type="Through Hole, Right Angle", Number of Positions=4, Number of Positions Loaded=All, Number of Rows=1, Overall Contact Length=-, Packaging=Tube, Part Status=Active, Pitch - Mating="0.100\" (2.54mm)", Pricing 1="1=2.53, 10=2.424, 100=2.02, 500=1.717, 1000=1.4645, 5000=1.313 (USD)", RoHS="RoHS Compliant", Row Spacing - Mating=-, Shrouding="Shrouded - 4 Wall", Stock 1=265, Style="Board to Cable/Wire", Supplier 1=Digi-Key, Termination=Solder
R1 R2: library part CMP-1011-00927-1, "TBD"
R5: library part CMP-1011-00927-1, Supplier Device Package=0402, Supplier Part Number 1=YAG3220CT-ND, Temperature Coefficient=±100ppm/°C, Tolerance=±1%
R6: library part CMP-1013-00017-1, Manufacturer="Vishay Dale", Manufacturer Part Number=CRCW0805280KFKEA, Operating Temperature="-55°C ~ 155°C", Package / Case="0805 (2012 Metric)", Power (Watts)="0.125W, 1/8W", Resistance (Ohms)=280k, Supplier Device Package=0805, Supplier Part Number 1=541-280KCTR-ND, Temperature Coefficient=±100ppm/°C, Tolerance=±1%, Category=Resistors, ComponentLink1Description=http://www.vishay.com/docs/20035/dcrcwe3.pdf, ComponentLink1URL=http://www.vishay.com/docs/20035/dcrcwe3.pdf, Composition="Thick Film", Failure Rate=-, Features="Automotive AEC-Q200", Height - Seated (Max)="0.020\" (0.50mm)", Packaging="Tape & Reel (TR)", Part Status=Active, Pricing 1="5000=0.00546, 10000=0.00474, 25000=0.00417, 50000=0.00382, 125000=0.00375 (USD)", RoHS="RoHS Compliant", Size / Dimension="0.079\" L x 0.049\" W (2.00mm x 1.25mm)", Stock 1=10000, Supplier 1=Digi-Key
R7: library part CMP-1013-00017-1, Manufacturer=Yageo, Manufacturer Part Number=RC0805FR-0710KL, Operating Temperature="-55°C ~ 155°C", Package / Case="0805 (2012 Metric)", Power (Watts)="0.125W, 1/8W", Resistance (Ohms)=10k, Supplier Device Package=0805, Supplier Part Number 1=311-10.0KCRCT-ND, Temperature Coefficient=±100ppm/°C, Tolerance=±1%, Category=Resistors, ComponentLink1Description=http://www.yageo.com/documents/recent/PYu-RC_Group_51_RoHS_L_7.pdf, ComponentLink1URL=http://www.yageo.com/documents/recent/PYu-RC_Group_51_RoHS_L_7.pdf, Composition="Thick Film", Failure Rate=-, Features="Moisture Resistant", Height - Seated (Max)="0.024\" (0.60mm)", Packaging="Cut Tape (CT)", Part Status=Active, Pricing 1="1=0.1, 10=0.022, 100=0.0088, 1000=0.00396, 2500=0.00344 (USD)", RoHS="RoHS Compliant", Size / Dimension="0.079\" L x 0.049\" W (2.00mm x 1.25mm)", Stock 1=13336570, Supplier 1=Digi-Key
R8: library part CMP-1011-00927-1, "RES SMD 6.98K OHM 1% 1/16W 0402", Manufacturer=Yageo, Manufacturer Part Number=RC0402FR-076K98L, Operating Temperature="-55°C ~ 155°C", Package / Case="0402 (1005 Metric)", Power (Watts)="0.063W, 1/16W", Supplier Device Package=0402, Supplier Part Number 1=YAG3220CT-ND, Temperature Coefficient=±100ppm/°C, Tolerance=±1%, Category=Resistors, ComponentLink1Description=http://www.yageo.com/documents/recent/PYu-RC_Group_51_RoHS_L_7.pdf, ComponentLink1URL=http://www.yageo.com/documents/recent/PYu-RC_Group_51_RoHS_L_7.pdf, Composition="Thick Film", Failure Rate=-, Features="Moisture Resistant", Height - Seated (Max)="0.016\" (0.40mm)", Packaging="Cut Tape (CT)", Part Status=Active, Pricing 1="1=0.1, 10=0.014, 100=0.0055, 1000=0.00247, 2500=0.00214, 5000=0.00177 (USD)", RoHS="RoHS Compliant", Size / Dimension="0.039\" L x 0.020\" W (1.00mm x 0.50mm)", Stock 1=182255, Supplier 1=Digi-Key
RLY1: library part CMP-1503-00270-1, "PF Relays, 12 V Coil Voltage, 170 mW Nominal Operating Power, -40 to 85 degC, 5-Pin PF, Tube, Case, RoHS", Coil Voltage="12 V", Manufacturer=Panasonic, Max Switching Current="6 A", Max Switching Voltage="250 V AC", Nominal Operating Power="170 mW", ComponentLink1Description="Manufacturer URL", ComponentLink1URL=http://www3.panasonic.biz/ac/ae/index.jsp, ComponentLink2Description=Datasheet, ComponentLink2URL=http://www3.panasonic.biz/ac/e_download/control/relay/power/catalog/mech_eng_pf.pdf?f_cd=300412, ComponentLink3Description="Package Specification", ComponentLink3URL=http://www3.panasonic.biz/ac/e_download/control/relay/power/catalog/mech_eng_pf.pdf?f_cd=300412, DatasheetVersion=201402-T, Electrical Life="5x10^4 (N.O.), 3x10^4 (N.C.)", Mechanical Life(Min.operation)=5x10^6, Mounting Technology="Through Hole", PackageDescription="5-Pin Through Hole Terminal Package, Body 28 x 5 mm", PackageReference=PF-5-2800x500x1500, PackageVersion="ASCTB205E, 02/2014", Packing="Tube, Case", PartNumber=APF30312, Pb-Free=True, RoHS=True, Series="PF Relays"
U1: library part CMP-0476-01685-1, "500 mA, Low Noise, LDO Micropower Regulator, 1.8 to 20 V Vin, 5 V Vout, 8-pin SOIC (S8-8), -40 to 125 degC, Pb-Free", Dropout Voltage(V)=0.3, Manufacturer="Linear Technology", Output Voltage="5 V", Shutdown Current(uA)=1, ComponentLink1Description="Manufacturer URL", ComponentLink1URL=http://www.linear.com/, ComponentLink2Description=Datasheet, ComponentLink2URL=http://cds.linear.com/docs/en/datasheet/1763fg.pdf, ComponentLink3Description="Package Specification", ComponentLink3URL=http://cds.linear.com/docs/en/packaging/05081610_G_SO8.pdf, DatasheetVersion="Rev. G", Discrete Pass Element=no, Iout(mA)=500, Isupply(mA)=0.03, Mounting Technology="Surface Mount", Noise(uV)=20, Number of Outputs=1, PackageDescription="8-Pin Plastic Small Outline (Narrow .150 Inch), Body 4.9 x 3.9 mm, Pitch 1.27 mm", PackageReference=S8-8, PackageVersion="Rev. G, 03/2012", PartNumber=LT1763CS8-5#PBF, PSRR(dB)=65, RoHS=TRUE, Vin Max(V)=20, Vin Min(V)=1.8
U2: Supplier Part Number 1=285-1905-ND, Supplier 1=Digi-Key
U3: "IC REG LDO 9V 0.3A 8HTSOP-J", Current - Limit (Min)=-, Current - Output=300mA, Manufacturer="Rohm Semiconductor", Operating Temperature="-25°C ~ 85°C", Package / Case="8-SOIC (0.154\", 3.90mm Width) Exposed Pad", Supplier Device Package=8-HTSOP-J, Supplier Part Number 1=BD90GA3WEFJ-E2CT-ND, Voltage - Dropout (Typical)="0.6V @ 300mA", Voltage - Input="Up to 14V", Voltage - Output=9V, Category="Integrated Circuits (ICs)", ComponentLink1Description=http://rohmfs.rohm.com/en/products/databook/datasheet/ic/power/linear_regulator/bdxxga3wefj-e.pdf, ComponentLink1URL=http://rohmfs.rohm.com/en/products/databook/datasheet/ic/power/linear_regulator/bdxxga3wefj-e.pdf, Manufacturer Part Number=BD90GA3WEFJ-E2, Mounting Type="Surface Mount", Packaging="Cut Tape (CT)", Part Status=Active, Pricing 1="1=0.69, 10=0.606, 25=0.5364, 100=0.4672, 250=0.40664, 500=0.34608, 1000=0.27686 (USD)", Regulator Topology="Positive Fixed", RoHS="RoHS Compliant", Stock 1=4781, Supplier 1=Digi-Key
U4: Base Part Number=LTC1983-5, Current - Output=100mA, Frequency - Switching=900kHz, Manufacturer="Linear Technology/Analog Devices", Operating Temperature="-40°C ~ 85°C (TA)", Package / Case="SOT-23-6 Thin, TSOT-23-6", Supplier Device Package=TSOT-23-6, Supplier Part Number 1=LTC1983ES6-5#TRMPBFCT-ND, Voltage - Input (Max)=5.5V, Voltage - Input (Min)=2.3V, Voltage - Output (Max)=-, Voltage - Output (Min/Fixed)=-5V, Category="Integrated Circuits (ICs)", ComponentLink1Description=http://www.linear.com/docs/2135, ComponentLink1URL=http://www.linear.com/docs/2135, Function=Step-Down, Manufacturer Part Number=LTC1983ES6-5#TRMPBF, Mounting Type="Surface Mount", Number of Outputs=1, Output Configuration=Negative, Output Type=Fixed, Packaging="Cut Tape (CT)", Part Status=Active, Pricing 1="1=4.36, 25=3.8952, 100=2.3256, 250=2.1318 (USD)", RoHS="RoHS Compliant", Stock 1=17516, Supplier 1=Digi-Key, Synchronous Rectifier=No, Topology="Charge Pump"
U5: library part CMP-0394-00528-2, "Single Output LDO, 300 mA, Fixed 3.3 V Output, 2 to 5.5 V Input, with Low IQ, 5-pin SOT-23 (DBV), -40 to 125 degC, Green (RoHS & no Sb/Br)", Manufacturer="Texas Instruments", Accuracy(%)=2, Code_JEDEC=MO-178, ComponentLink1Description="Manufacturer URL", ComponentLink1URL=http://www.ti.com/, ComponentLink2Description=Datasheet, ComponentLink2URL=http://www.ti.com/general/docs/lit/getliterature.tsp?genericPartNumber=TLV70233&fileType=pdf, ComponentLink3Description="Package Specification", ComponentLink3URL=http://www.ti.com/litv/pdf/mpds018i, DatasheetVersion=SLVSAG6B, Eco-Plan="Green (RoHS & no Sb/Br)", Fixed Output Options(V)=3.3, Iout(Max)(A)=0.3, Iq(Typ)(mA)=0.03, Mounting Technology="Surface Mount", PackageDescription="5-Pin Plastic Small Outline, Body 1.60 Ã— 2.90 mm, Pitch 0.95 mm", PackageReference=DBV0005A, PackageVersion=4073253-4/K, PartNumber=TLV70233DBVR, SubFamily="Single Channel LDO", Vdo(Typ)(mV)=220, Vin(Max)(V)=5.5, Vin(Min)(V)=2, Vout Adj(Max)(V)=3.3, Vout Adj(Min)(V)=3.3
U6: "DC/DC CONVERTER 12V 2.5A PCB", Current - Output (Max)=2.5A, Manufacturer 1="TDK-Lambda Americas Inc", Operating Temperature="-40°C ~ 85°C", Package / Case="6-DIP Module (6 Leads)", Power (Watts) - Manufacture Series=30W, Supplier Part Number 1=285-2419-ND, Voltage - Input (Max)=36V, Voltage - Input (Min)=9V, Voltage - Isolation="1.5kV (1500V)", Voltage - Output 1=12V, Voltage - Output 2=-, Category 1="Power Supplies - Board Mount", ComponentLink1Description=http://www.us.tdk-lambda.com/ftp/specs/ccg30.pdf, ComponentLink1URL=http://www.us.tdk-lambda.com/ftp/specs/ccg30.pdf, Description 1="DC/DC CONVERTER 12V 2.5A PCB", Efficiency=89%, Features="Remote On/Off, OCP", Manufacturer Part Number 1=CCG302412S, Mounting Type="Through Hole", Number of Outputs=1, Packaging=Tube, Power (Watts) - Max=30W, Pricing 1="1=43.63, 10=42.95 (USD)", RoHS 1="RoHS Compliant", Size / Dimension="1.00\" L x 1.00\" W x 0.39\" H (25.4mm x 25.4mm x 9.9mm)", Stock 1=30, Supplier 1=Digi-Key, Type="Isolated Module", Voltage - Output 3=-
U7: library part CMP-0809-00005-2, "Precision, Low Noise, Rail-to-Rail Output, Zero-Drift Operational Amplifier, 4 to 36 V, -40 to 125 degC, 5-pin SOT23 (DBV5), Green (RoHS & no Sb/Br)", Manufacturer="Texas Instruments", Rating=Catalog, Total Supply Voltage(Max)(+5V is 5, +/-5V is 10)=36, Total Supply Voltage(Min)(+5V is 5, +/-5V is 10)=4, CMRR(Min)(dB)=120, Code_JEDEC=MO-178, ComponentLink1Description="Manufacturer URL", ComponentLink1URL=http://www.ti.com/, ComponentLink2Description=Datasheet, ComponentLink2URL=http://www.ti.com/lit/ds/symlink/opa188.pdf, ComponentLink3Description="Package Specification", ComponentLink3URL=http://www.ti.com/litv/pdf/mpds018i, DatasheetVersion=SBOS642A, Eco-Plan="Green (RoHS & no Sb/Br)", GBW(Typ)(MHz)=2, Iq per channel(Max)(mA)=0.51, Mounting Technology="Surface Mount", Number of Channels=1, Offset Drift(Typ)(uV/C)=0.03, PackageDescription="5-Pin Plastic Small Outline, Body 1.6 x 2.9 mm, Pitch 0.95 mm", PackageReference=DBV0005A, PackageVersion="4073253-4/K, 03/2006", PartNumber=OPA188AIDBVR, Slew Rate(Typ)(V/us)=0.8, SubFamily="Zero Drift Precision Amplifier"
U8: library part CMP-0491-01698-1, "IC REG BOOST ADJ 0.3A TSOT23-6", Current - Output="300mA (Switch)", Frequency - Switching=3MHz, Manufacturer 1="Linear Technology", Manufacturer Part Number 1=LT3461AES6#TRMPBF, Operating Temperature="0°C ~ 70°C (TA)", Package / Case="SOT-23-6 Thin, TSOT-23-6", Supplier Device Package=TSOT-23-6, Supplier Part Number 1=LT3461AES6#TRMPBFCT-ND, Voltage - Input (Max)=16V, Voltage - Input (Min)=2.5V, Voltage - Output (Max)=38V, Voltage - Output (Min/Fixed)=1.255V, Category 1="Integrated Circuits (ICs)", ComponentLink1Description=http://www.linear.com/docs/3469, ComponentLink1URL=http://www.linear.com/docs/3469, Description 1="IC REG BOOST ADJ 0.3A TSOT23-6", Function=Step-Up, Mounting Type="Surface Mount", Number of Outputs=1, Output Configuration=Positive, Output Type=Adjustable, Packaging="Cut Tape (CT)", Part Status=Active, Pricing 1="1=3.94, 25=3.52, 100=2.4, 250=2.2 (USD)", RoHS 1="RoHS Compliant", Stock 1=1325, Supplier 1=Digi-Key, Synchronous Rectifier=No, Topology=Boost

## Free pads (board coordinates)
  round 5 hole 3: 3(125.439,-126.978) ""(0,0) ""(0,59.69) ""(59.69,0) ""(59.69,59.69)

## Via types
v1: diameter 1.27, hole 0.711, Top Layer to Bottom Layer, 4 vias

## Nets (pads, with @x,y where several pads share a name; then routed paths per layer and width w, separated by ;. In a path a pad name is that pad's centre, name@x,y a point inside that pad or via, vN(x,y) a via of type N, cw(c..) or ccw(c..) an arc to the next point about the centre after c; other vN are vias at no path point)
5V-RC: U1.5
+3.3: C10.2 P2.6 U5.5 | length 19.3
  Top Layer w0.254: P2.6 59.497,43.373 59.497,28.948 U5.5@59.058,28.509 ; U5.5@58.933,28.509 U5.5@59.058,28.509 ; C10.2 60.639,27.602 59.965,27.602 U5.5@59.058,28.509
+5: C2.2 C4.1 C11.2 C13.2 C19.2 C20.2 C21.2 L1.1 P2.14 R8.2 U1.1 U1.2 U4.1 U4.6 U5.1 U5.3 U8.4 U8.6 | length 119
  Top Layer w0.254: C4.1 22.352,32.234 U1.2 ; 52.455,30.48 52.836,30.099 56.007,30.099 ; U5.3@56.383,26.609 56.383,25.589 56.758,25.214 56.758,25.062 57.206,24.614 C13.2 57.11,25.035 57.11,28.412 57.038,28.484 56.508,28.484 56.508,28.509 56.383,28.634 56.383,29.723 56.007,30.099 ; P2.14 57.094,32.964 57.094,31.186 56.007,30.099
  Bottom Layer w0.254: R8.2 11.226,53.79 17.302,59.866 44.637,59.866 C21.2@44.831,60.06 ; C11.2 42.14,39.187 42.958,40.005 47.244,40.005 50.546,36.703 52.959,36.703 55.372,34.29 P2.14 ; U8.4 44.891,60 C21.2@44.831,60.06 ; L1.1@48.387,58.524 46.798,58.524 46.643,58.679 46.643,58.906 45.235,60.314 C21.2 C21.2@44.831,60.06 ; L1.1@49.251,58.524 49.674,58.101 52.118,58.101 52.653,57.566 54.989,57.566 62.037,50.518 62.037,36.384 61.109,35.456 59.586,35.456 P2.14@58.534,34.404
  Bottom Layer w0.5: L1.1@48.387,58.524 L1.1@49.022,58.524
"+5 BBB": C3.2 C9.1 C22.1 R2.2 R5.2 U1.8 U2.4 U7.5 | length 18.6
  Top Layer w0.5: U1.8@23.622,23.876 34.163,23.876
  Bottom Layer w0.5: R5.2 16.268,22.638 ; U7.5@16.293,21.572 16.293,22.663 ; U7.5@16.343,21.355 18.398,21.355 C9.1@18.506,21.463 ; C9.1@18.398,21.209 18.409,21.22 21.017,21.22 21.895,22.098 v1(22.098,22.098)
+9: C5.2 P1.9 U3.1 U3.2 | length 40.6
  Bottom Layer w0.254: P1.9 36.344,16.51 37.441,15.413 C5.2 ; C5.2@36.938,15.265 U3.1 U3.2
+12: C7.2 C15.2 P1.15 P1.16 U3.5 U3.8 U6.4 | length 58.1
  Bottom Layer w0.5: P1.16 17.704,8.89 18.574,9.761 33.468,9.761 U3.8@36.863,6.366 ; U3.8@37.013,5.466 38.567,3.912 40.822,3.912 ; U3.5@40.822,5.466 40.822,3.912 ; U3.5@40.822,5.916 U3.5@40.822,6.375 ; U6.4@51.688,0.191 48.718,0.191 C15.2 48.518,1.341 46.05,3.809 43.283,3.809 43.18,3.912 40.822,3.912
-5: C12.2 P2.16 U4.2 | length 34.9
  Bottom Layer w0.254: U4.2 42.588,41.021 42.588,41.533 41.238,42.883 38.43,42.883 38.238,42.691 38.238,37.827 44.315,31.75 P2.16
Aux+: P4.1 RLY1.2 RLY1.5 | length 31.2
  Top Layer w0.5: RLY1.2 6.447,44.577 24.311,44.577 RLY1.5 ; 18.288,44.577 18.288,47.139 P4.1
Batt+: P3.1 RLY1.3 | length 11.9
  Top Layer w0.5: P3.1@6.044,51.106 10.795,46.355 RLY1.3
"Battery Thermistor": P1.2 P3.3 R8.1 | length 38.7
  Bottom Layer w0.254: -2.286,46.101 -2.286,27.148 -1.808,26.67 P1.2 ; -2.271,46.243 -0.185,48.329 8.255,48.329 ; 8.221,48.202 P3.3 ; P3.3@11.176,51.199 R8.1
BBB_Power: P1.1
GND: C1.2 C2.1 C3.1 C5.1 C6.2 C7.1 C8.2 C9.2 C10.1 C11.1 C12.1 C13.1 C17.1 C18.1 C19.1 C20.1 C21.1 P1.6 P1.8 P1.10 P1.12 P1.13 P1.14 P2.5 P2.7 P2.9 P2.11 P2.13 P2.15 P3.2 P4.3 P4.4 R7.2 RLY1.1 U1.3 U1.6 U1.7 U2.1 U2.2 U3.3 U4.5 U5.2 U6.2 U6.6 U7.2 U8.2
NetC1_1: C1.1 R1.2 U2.6
NetC4_2: C4.2 U1.4
NetC14_1: C14.1 U4.4 | length 2.2
  Bottom Layer w0.254: U4.4 47.601,42.023 C14.1
NetC14_2: C14.2 U4.3 | length 2.3
  Bottom Layer w0.254: U4.3 44.601,42.173 C14.2
NetC16_1: C16.1 R6.2 R7.1 U8.3 | length 7.5
  Bottom Layer w0.254: R7.1 R7.1@40.615,52.568 ; R6.2@42.657,55.118 R6.2 ; U8.3@44.891,55.534 U8.3
  Bottom Layer w0.5: R7.1@40.615,52.568 40.395,52.788 40.395,54.538 40.658,54.801 42.215,54.801 42.532,55.118 R6.2@42.657,55.118 ; R6.2 43.098,55.559 44.866,55.559 U8.3@44.891,55.534
NetF1_1: F1.1 P2.3 RLY1.4 | length 47.2
  Top Layer w0.254: F1.1@40.894,52.203 F1.1@41.015,52.324
  Top Layer w0.5: v1(40.894,48.006) F1.1@40.894,52.203
  Bottom Layer w0.5: RLY1.4@21.234,46.54 23.579,44.196 ; 23.622,44.069 37.165,44.069 41.286,48.19 59.76,48.19 P2.3
NetL1_2: L1.2 U8.1 | length 2.5
  Bottom Layer w0.254: U8.1 49.183,55.756 L1.2@49.251,55.824
NetP1_3: P1.3 P4.2 | length 37.5
  Bottom Layer w0.254: P1.3 3.78,24.13 7.119,27.469 7.119,34.297 21.717,48.895 22.584,48.895 P4.2
NetR1_1: R1.1 R2.1 U2.5
Power_IN: C6.1 C8.1 C15.1 C22.2 F1.2 P2.1 U2.3 U6.3 | length 88.2
  Top Layer w0.254: F1.2@46.615,52.324 F1.2@46.742,52.197 ; 47.625,36.449 50.292,39.116 U2.3 ; 50.419,50.038 52.578,52.197 ; U2.3@52.705,38.354 U2.3@52.705,38.735 ; U2.3@52.705,39.12 U2.3@52.705,38.735 ; U2.3@52.735,38.735 U2.3@52.705,38.735
  Top Layer w0.5: U6.3 47.625,23.305 47.625,36.449 ; F1.2@46.742,52.197 52.578,52.197 58.293,52.197 P2.1 ; 50.419,50.038 50.419,41.406 U2.3@52.705,39.12 ; U2.3@52.294,38.354 U2.3@52.705,38.354
  Bottom Layer w0.5: U6.3 38.051,1.891 43.668,1.891 44.218,1.341 C15.1
RC: R5.1 U6.1 U7.1 U7.4 | length 33.1
  Top Layer w0.254: v1(35.687,37.592) 35.687,38.789 36.268,39.37
  Bottom Layer w0.254: 7.239,24.422 10.401,21.26 ; 10.033,20.892 10.401,21.26 ; U7.4@14.368,20.972 16.07,19.27 16.07,18.495 U7.1 ; R5.1 14.892,23.064 14.368,22.54 14.368,21.09 14.17,20.892 10.769,20.892 10.401,21.26 ; 29.337,24.041 29.337,31.242 v1(35.687,37.592)
Sys_Pwr_Enable: P1.7 U7.3 | length 12.5
  Bottom Layer w0.254: P1.7 2.818,19.05 3.527,18.34 U7.3@14.224,18.34 ; U7.3@14.17,18.721 14.368,18.523 U7.3
ZH: C16.2 C17.2 C18.2 P2.12 R6.1 U8.5 | length 54.1
  Top Layer w0.254: v1(55.905,49.86) 55.905,39.345 P2.12
  Bottom Layer w0.254: C18.2 34.515,57.665 33.613,56.763 33.613,53.955 37.707,49.86 v1(55.905,49.86) ; C18.2@35.027,57.658 C17.2 37.921,57.558 42.805,57.558 43.184,57.179 45.301,57.179 45.693,57.571 45.693,58.008 U8.5
pads on no net: P1.4 P1.5 P1.11 P2.2 P2.4 P2.8 P2.10 P3.4 P3.5 U3.4 U3.6 U3.7 U5.4 U6.5

## Polygon pours and split planes (outlines as drawn)
GND on Bottom Layer "GND" (solid, shelved, pour order 10): 55.601,65.556 55.601,49.808 32.487,49.808 32.487,65.556
no net on Bottom Layer "C21_1" (solid, shelved, pour order 8): 45.187,56.158 39.599,56.158 39.599,51.332 41.885,51.332 41.885,54.126 45.187,54.126
ZH on Bottom Layer "ZH" (solid, shelved, pour order 6): 46.203,58.952 33.503,58.952 33.503,56.412 33.757,56.666 46.203,56.666
GND on Bottom Layer "NONET_L02_P004" (solid, shelved, pour order 4): 63.197,66.178 63.197,-3.822 -3.803,-3.822 -3.803,66.178
+5 on Bottom Layer "5V" (solid, shelved, pour order 0): 54.871,57.034 44.457,57.034 44.457,60.844 54.871,60.844
GND on Top Layer "NONET_L01_P002" (solid, shelved, pour order 2): -3.829,66.18 -3.829,-3.924 63.227,-3.924 63.227,66.18

## Silkscreen, mask and mechanical layers (free items; w line width, h text height)
Top Overlay:
  circle w0.1: c14.66,15.165 r4.663
  circle w0.254: c14.66,15.165 r5
  lines w0.127: 13.136,17.528 13.898,16.766 14.66,17.274 13.644,16.004 15.168,16.766 14.152,15.496 15.676,16.258 14.66,14.988 16.184,15.75 15.168,14.48 16.692,15.242 16.184,14.48 16.946,13.718
  lines w0.254: 12.628,17.655 13.644,17.655 ; 13.136,17.528 13.136,13.718 16.946,13.718 ; 17.073,13.21 17.073,14.226
  text "Battery" at 7.874,48.387 h1
  text "Aux/ lid" at 22.479,48.387 h1
  text "ZLS" at 13.644,11.863 h1.2
  text "Power Input Module" at 6.913,4.497 h1
  text "LM-008" at 7.167,3.227 h1
  text "REV A1" at 7.167,1.195 h1
  text "ZLS Corp" at 7.167,-0.583 h1

## Dimensions
59.69,0 to 60.96,31.75 on Mechanical 1
0,0 to 0,8.89 on Mechanical 1
59.69,0 to 59.69,59.69 on Mechanical 1
0,0 to 59.69,0 on Mechanical 1
0,0 to -3.81,-3.81 on Mechanical 1
-3.81,-3.81 to -3.81,66.19 on Mechanical 1
-3.81,-3.81 to 63.197,-4.822 on Mechanical 1